# Altium PCB Control_and_inputs.PcbDoc
Units mil, origin at the board's own origin, x right, y up, seen from the top; angles counter-clockwise.
Board outline 3935 x 2550 mil, 2 copper layers (Top Layer, Bottom Layer); 25 components, 28 nets, 143 pads, 10 vias.
Unrouted connection lines stored in the file: 2.
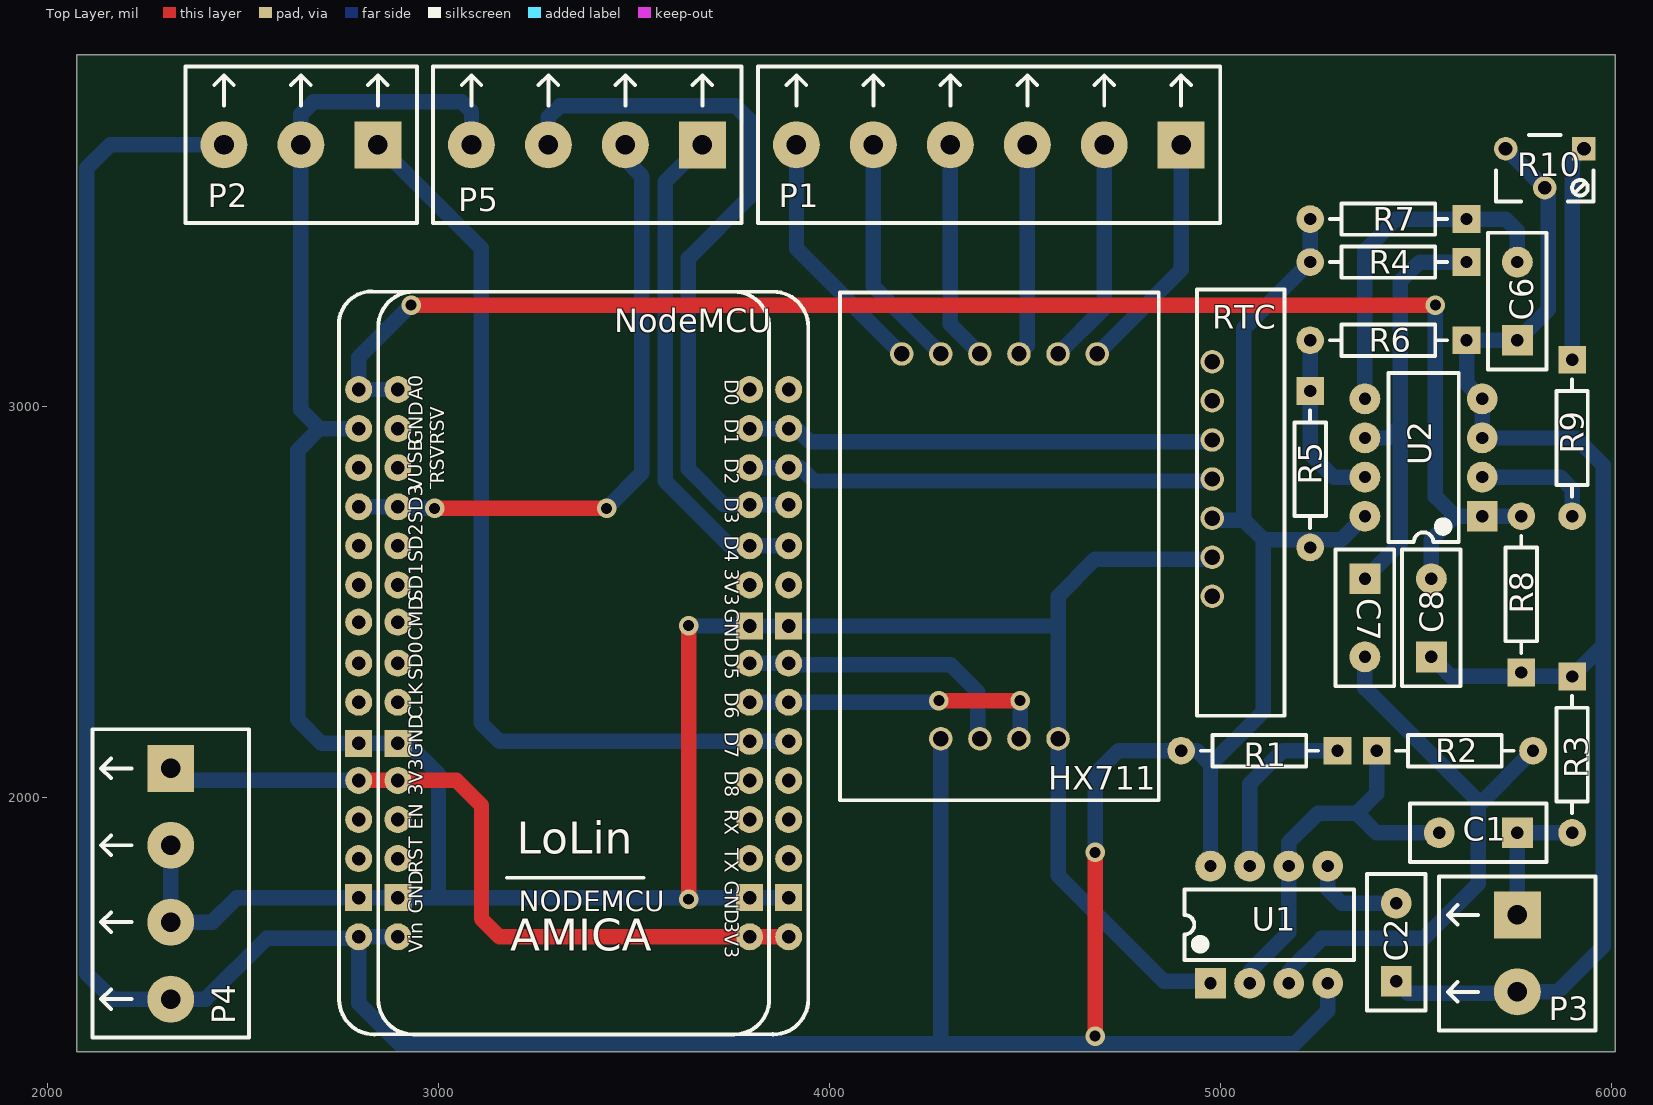
[diagram p0: Top Layer view]
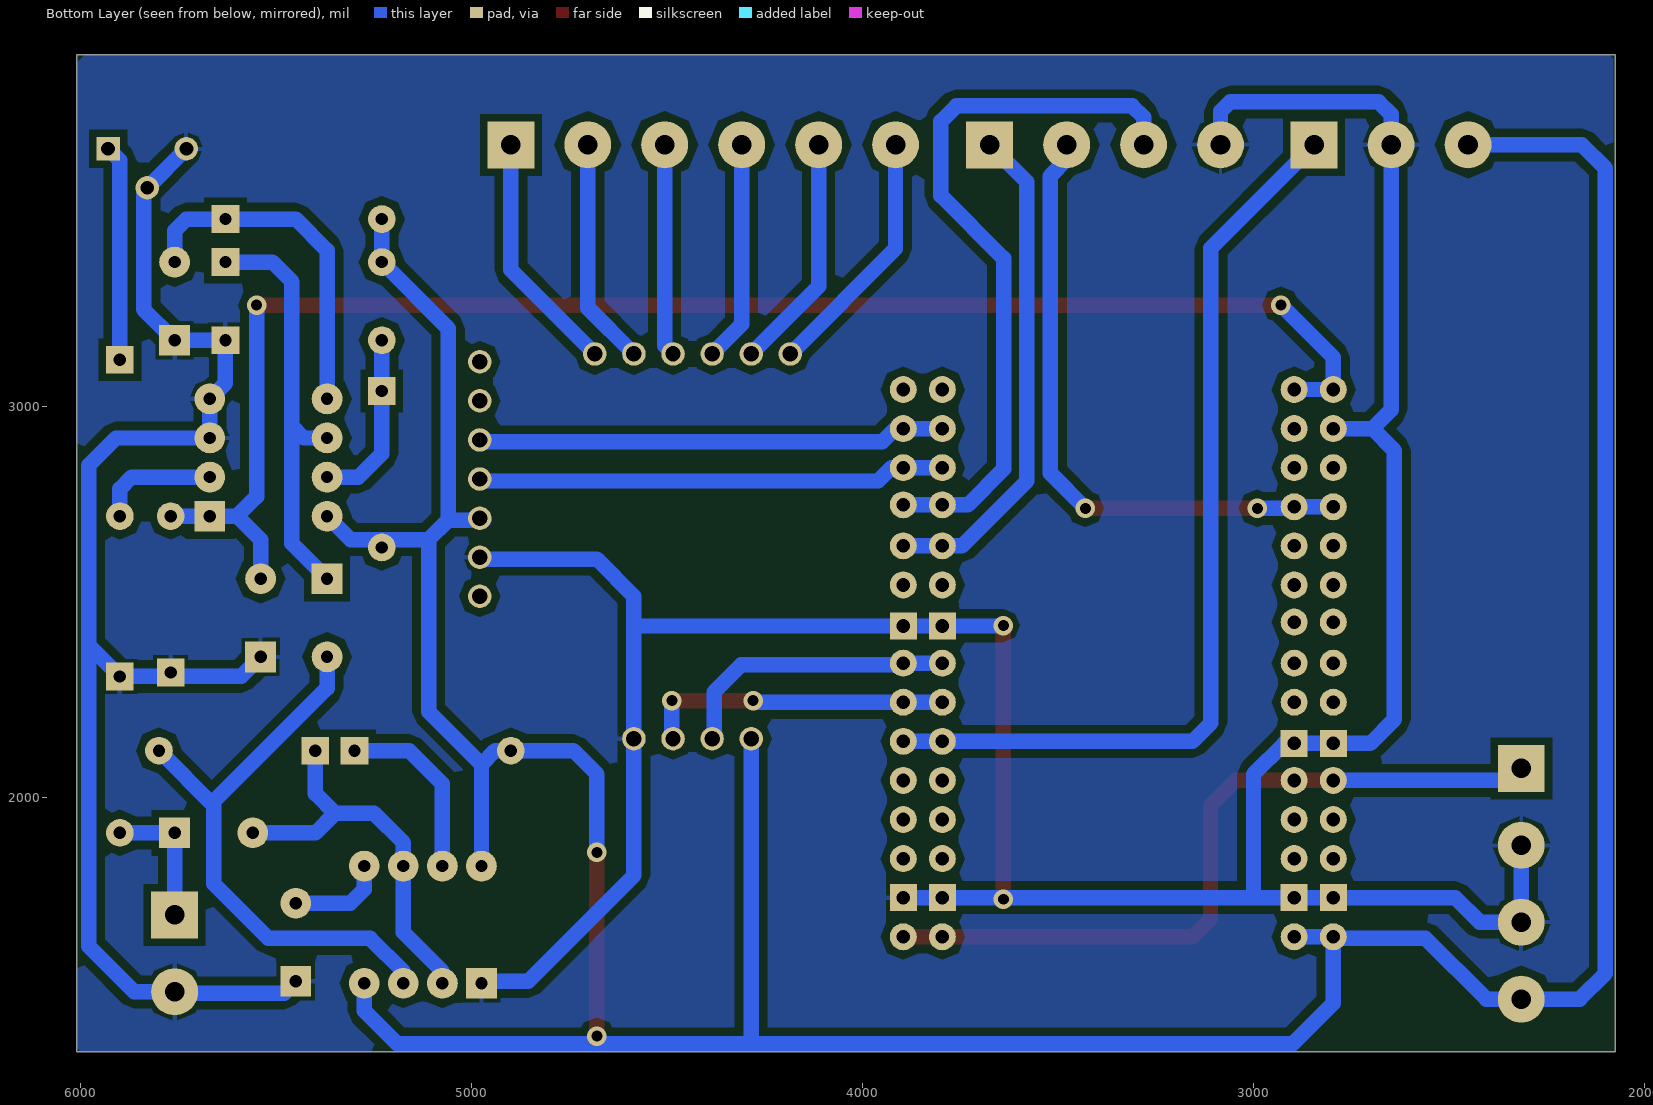
[diagram p1: Bottom Layer view, seen from below]
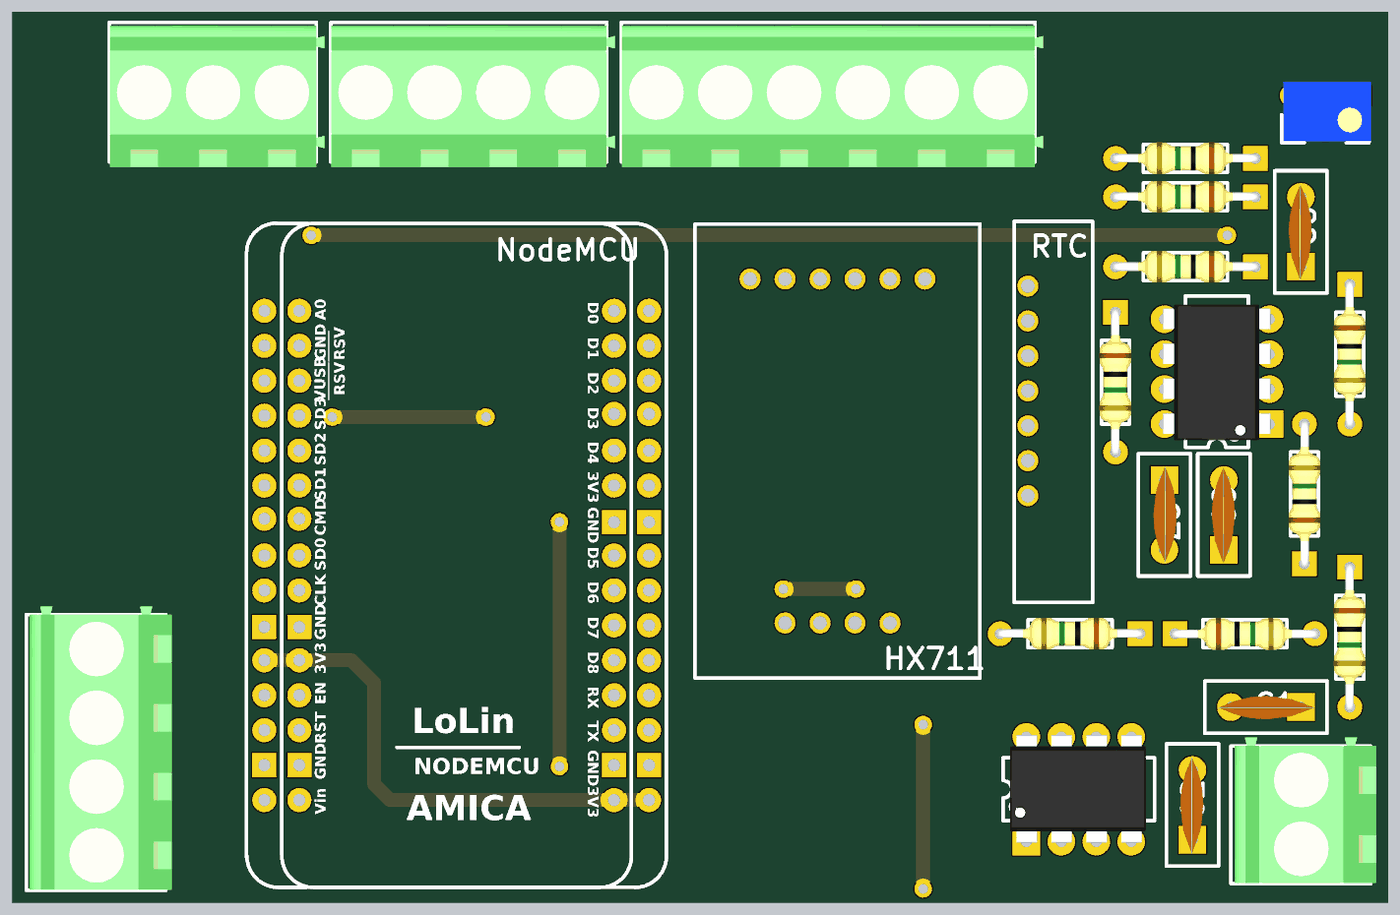
[diagram p2: 3D render of the assembled board from above, using the file's embedded part models]

## Layer stack, top to bottom
Top Solder: solder mask 0.4, Solder Resist, Dk 3.5
Top Layer: signal copper 1.4
Dielectric 1: dielectric 12.6, FR-4, Dk 4.8
Bottom Layer: signal copper 1.4
Bottom Solder: solder mask 0.4, Solder Resist, Dk 3.5

## Board outline
2075,1350 2075,3900 6010,3900 6010,1350

## Design rules (kind name [scope] priority, off if disabled: settings)
Clearance [All] p1: gap=20
PolygonConnect [All] p1: connectstyle=Relief reliefconductorwidth=10 reliefentries=4 polygonreliefangle="90 Angle" airgapwidth=10
RoutingVias [All] p1: holewidth=28 width=50 viastyle="Through Hole" minholewidth=28 minwidth=50 maxholewidth=28 maxwidth=50
SolderMaskExpansion [All] p1: expansion=4
Width [All] p1: maxlimit=39.37 minlimit=39.37 preferedwidth=39.37
30 further rules are at their usual default settings.

## Components (designator, comment, footprint, x,y, rotation, side; value= is the part's Value field where it differs from the comment)
C1 "22nF" C200-350-150 5760,1910 r180 top
C2 "100nF" C200-350-150 5450,1530 r90 top
C6 "10nF" C200-350-150 5760,3170 r90 top
C7 "470pF" C200-350-150 5370,2560 r270 top
C8 "100nF" C200-350-150 5540,2360 r90 top
HX711 "HX711" HX711 4685,3135 r270 top
NodeMCU "ESP-F DevKit V4" "LoLin (+ NodeMCU)" 2845,3290 r0 top
P1 "Loads Cells" KRE_6 4900,3670 r180 top
P2 "Temp Sensor" KRE_3 2845,3670 r180 top
P3 "Water Level Sensor Capacitive" KRE_2 5760,1700 r270 top
P4 "Power Sources" KRE_4 2315,2075 r270 top
P5 "Outs" KRE_4 3675,3670 r180 top
R1 "10K" R400-2.0mm 5300,2120 r180 top
R2 "100K" R400-2.0mm 5400,2120 r0 top
R3 "4.7M" R400-2.0mm 5900,2310 r270 top
R4 "10K" R400-2.0mm 5630,3370 r180 top
R5 "10K" R400-2.0mm 5230,3040 r270 top
R6 "10K" R400-2.0mm 5630,3170 r180 top
R7 "6.8K" R400-2.0mm 5630,3480 r180 top
R8 "100K" R400-2.0mm 5770,2320 r90 top
R9 "12K" R400-2.0mm 5900,3120 r270 top
R10 "5K" Trimpot-3260W 5930,3660 r180 top
RTC "Tiny RTC DS1307" TinyRTC 4940,3300 r0 top
U1 "NE555" DIP08-300(100) 4975,1525 r0 top
U2 "LM331" DIP08-300(100) 5670,2720 r90 top

## Footprints (in the part's own frame and the unit in brackets; to place one, negate y for a bottom-side part, rotate by r counter-clockwise, add the part's x,y. Pads: shape width x height; smd on the part's side, far side on the other; paste and mask are expansions set on the pad)
C200-350-150 [mm] "Radial Cap, Thru-Hole; 2 Leads; 0.2 in Pin Spacing"
  rect 2x2 hole 0.8: 1(0,0)
  round 2 hole 0.8: 2(5.08,0)
  silkscreen extent -1.91,-1.91 6.98,1.91, body extent -1.01,-0.81 5.98,0.89, height 7.31
DIP08-300(100) [mm] "DIP; 8 Leads; Row Spacing 7.62 mm; Pitch 2.54 mm"
  rect 2x2 hole 0.8: 1(0,0)
  round 2 hole 0.8: 2(2.54,0) 3(5.08,0) 4(7.62,0) 5(7.62,7.62) 6(5.08,7.62) 7(2.54,7.62) 8(0,7.62)
  silkscreen extent -1.69,1.52 9.31,6.1, body extent -1.19,-0.08 8.69,7.75, height 4.3
HX711 [mil]
  round 60 hole 39.37: 1(0,0) 2(0,-100) 3(0,-200) 4(0,-300) 5(0,-400) 6(0,-500) 7(984.25,-100) 8(984.25,-200) 9(984.25,-300) 10(984.25,-400)
  silkscreen extent -157,-657 1142,157
KRE_2 [mil] "Terminal Block 2 pins"
  rect 120x120 hole 50: 1(0,0)
  round 120 hole 50: 2(196.85,0)
  silkscreen extent -98,-200 295,200, body extent -123,-190 294,216, height 559
KRE_3 [mil] "Terminal Block 3 pins"
  rect 120x120 hole 50: 1(0,0)
  round 120 hole 50: 2(196.85,0) 3(393.7,0)
  silkscreen extent -100,-200 492,200, body extent -123,-190 491,216, height 559
KRE_4 [mil] "Terminal Block 4 pins"
  rect 120x120 hole 50: 1(0,0)
  round 120 hole 50: 2(196.85,0) 3(393.7,0) 4(590.55,0)
  silkscreen extent -100,-200 689,200, body extent -123,-190 688,216, height 559
KRE_6 [mil] "Terminal Block 6 pins"
  rect 120x120 hole 50: 1(0,0)
  round 120 hole 50: 2(196.85,0) 3(393.7,0) 4(590.55,0) 5(787.4,0) 6(984.25,0)
  silkscreen extent -100,-200 1083,200, body extent -123,-190 1081,216, height 559
"LoLin (+ NodeMCU)" [mil]
  round 69 hole 35: 3V3(-49,-1246) 3V3(51,-1246) 3V3(951,-1646) 3V3(951,-746) 3V3(1051,-1646) 3V3(1051,-746) A0(-49,-246) A0(51,-246) CLK(-49,-1046) CLK(51,-1046) CMD(-49,-841) CMD(51,-841) D0(951,-246) D0(1051,-246) D1(951,-346) D1(1051,-346) D2(951,-446) D2(1051,-446) D3(951,-541) D3(1051,-541) D4(951,-646) D4(1051,-646) D5(951,-946) D5(1051,-946) D6(951,-1046) D6(1051,-1046) D7(951,-1146) D7(1051,-1146) D8(951,-1246) D8(1051,-1246) EN(-49,-1346) EN(51,-1346) GND(-49,-346) RST(-49,-1446) RST(51,-1446) RX(951,-1346) RX(1051,-1346) SD0(-49,-946) SD0(51,-946) SD1(-49,-746) SD1(51,-746) SD2(-49,-646) SD2(51,-646) SD3(-49,-546) SD3(51,-546) TX(951,-1446) TX(1051,-1446) VIN(-49,-1646) VIN(51,-1646) VUSB(-49,-446) ""(51,-446) ""(51,-346)
  rect 69x69 hole 35: GND(-49,-1546) GND(-49,-1151) GND(51,-1546) GND(51,-1151) GND(951,-1546) GND(951,-851) GND(1051,-1546) GND(1051,-851)
  silkscreen extent -100,-1896 1101,5
R400-2.0mm [mm] "Axial Device, Thru-Hole; 2 Leads; 0.4 in Pin Spacing"
  rect 1.8x1.8 hole 0.8: 1(0,0)
  round 1.8 hole 0.8: 2(10.16,0)
  silkscreen extent 1.27,-1.02 8.89,1.02, body extent -0.3,-1.17 10.46,1.14, height 2.93
TinyRTC [mm]
  round 1.524 hole 1: 1(1,-4.7) 2(1,-7.24) 3(1,-9.78) 4(1,-12.32) 5(1,-14.86) 6(1,-17.4) 7(1,-19.94)
  silkscreen extent 0,-27.7 5.7,0
Trimpot-3260W [mil] "Trimpot 3260W"
  rect 60x60 hole 35.43: 1(0,0)
  round 60 hole 35.43: 2(100,100) 3(200,0)
  silkscreen extent -25,-35 225,135, body extent -30,-40 220,130, height 290

## Part data
C1 C2 C6 C7 C8: library part Capacitor, "Capacitor"
NodeMCU: library part "NodeMCU V1.0 ESP-12E_1"
P1: library part KRE_6, "Terminal Block 1x6"
P2: library part KRE_3, "Terminal Block 1x3"
P3: library part KRE_2, "Terminal Block 1x2"
P4 P5: library part KRE_4, "Terminal Block 1x4"
R1 R2 R3 R4 R5 R6 R7 R8 R9: library part Resistor, "Resistor"
R10: library part Trimpot, "Trimpot"
U1: "NE555 Precision Timers"

## Via types
v1: diameter 50, hole 28, Top Layer to Bottom Layer, 10 vias

## Nets (pads, with @x,y where several pads share a name; then routed paths per layer and width w, separated by ;. In a path a pad name is that pad's centre, name@x,y a point inside that pad or via, vN(x,y) a via of type N, cw(c..) or ccw(c..) an arc to the next point about the centre after c; other vN are vias at no path point)
3.3V: NodeMCU.3V3 P4.1 | length 1929.4
  Top Layer w39.37: NodeMCU.3V3@2796,2044 2896,2044 3046,2044 3110,1980 3110,1690 3156,1644 3796,1644 NodeMCU.3V3@3896,1644
  Bottom Layer w39.37: P4.1 2346,2044 NodeMCU.3V3@2796,2044
5V: HX711.10 NodeMCU.VIN P2.3 P4.4 R1.2 R4.2 R5.2 R7.2 RTC.5 U1.4 U1.8 U2.8 | length 10080.3
  Top Layer w39.37: v1(4680,1390) v1(4680,1860)
  Bottom Layer w39.37: P2.3 2160,3670 2100,3610 2100,1550 2165.55,1484.45 P4.4 2404.45,1484.45 2560,1640 2792,1640 NodeMCU.VIN@2796,1644 ; NodeMCU.VIN@2896,1644 NodeMCU.VIN@2796,1644 ; 4285,1375 HX711.10 ; v1(4680,1860) 4680,2060 4740,2120 R1.2 4940,2120 4975,2085 ; RTC.5@4969.37,2709.96 5060.04,2709.96 ; U1.8 4975,2085 ; R7.2 R4.2 5060.04,3200.04 5060.04,2709.96 ; U1.4 5275,1455 5190,1370 2900,1370 2796,1474 NodeMCU.VIN@2796,1644 ; U2.8 5310,2660 5110,2660 ; 4975,2085 5110,2220 5110,2660 ; 5060.04,2709.96 5110,2660
A0: C8.2 NodeMCU.A0 R8.2 U2.1 | length 3907.1
  Top Layer w39.37: v1(2930,3260) v1(5550,3260)
  Bottom Layer w39.37: NodeMCU.A0@2896,3044 2796,3044 2796,3126 v1(2930,3260) ; C8.2 5540,2660 5600,2720 ; v1(5550,3260) 5550,2770 5600,2720 ; R8.2 U2.1 5600,2720
GND: C2.1 C6.1 C8.1 HX711.7 NodeMCU.GND P2.2 P3.2 P4.2 P4.3 P5.4 R3.1 R6.1 R8.1 R10.2 R10.3 RTC.6 U1.1 U2.3 U2.4 | length 11703.2
  Top Layer w39.37: v1(3640,1740) v1(3640,2440)
  Bottom Layer w39.37: P4.2 P4.3 2421.3,1681.3 2484,1744 2796,1744 NodeMCU.GND@3896,1744 ; NodeMCU.GND@2796,2944 2696,2944 ; 3000,1744 3000,2060 2921,2139 2796,2139 2701,2139 2640,2200 2640,2888 2696,2944 ; P5.4 3084.45,3755.55 3060,3780 2680,3780 2648.15,3748.15 P2.2 2648.15,2991.85 2696,2944 ; v1(3640,2440) 3761,2439 3896,2439 4584,2439 ; RTC.6@4969.37,2609.96 4679.96,2609.96 4585,2515 HX711.7 4585,1800.79 4855.67,1530.12 4969.88,1530.12 U1.1 U1.1@4975,1543.11 ; C2.1 5480,1500 5756.85,1500 P3.2 5863.15,1503.15 5980,1620 5980,2390 ; C8.1 5590,2310 R3.1 5980,2390 ; R10.3 R10.2 5839.06,3560 5839.06,3249.06 C6.1 R6.1 5630,3060 U2.4 U2.3 5910,2920 5980,2850 5980,2390
NetC1_1: C1.1 P3.1 R3.2 | length 350
  Bottom Layer w39.37: P3.1 C1.1 R3.2
NetC1_2: C1.2 R2.1 U1.2 U1.6 | length 1018.9
  Bottom Layer w39.37: U1.2 5075,1555 5175,1655 5175,1740 U1.6 5175,1885 5250,1960 5350,1960 ; R2.1 5400,2010 5350,1960 ; C1.2 5400,1910 5350,1960
NetC2_2: C2.2 U1.5 | length 249.5
  Bottom Layer w39.37: U1.5 5275,1765 5310,1730 C2.2
NetC6_2: C6.2 R7.1 U2.5 | length 895.6
  Bottom Layer w39.37: U2.5 5370,3400 5450,3480 R7.1 5730,3480 5760,3450 C6.2
NetC7_1: C7.1 R4.1 U2.6 | length 1090.4
  Bottom Layer w39.37: C7.1 5460,2650 5460,2950 ; U2.6 5430,2920 5460,2950 ; R4.1 5510,3370 5460,3320 5460,2950
NetC7_2: C7.2 R2.2 U1.3 | length 1496.3
  Bottom Layer w39.37: U1.3 5175,1555 5260,1640 5520,1640 5660,1780 5660,1980 R2.2 ; C7.2 5370,2280 5660,1990
NetHX711_1: HX711.1 P1.1 | length 624.1
  Bottom Layer w39.37: HX711.1 4900,3350 P1.1
NetHX711_2: HX711.2 P1.2 | length 583.9
  Bottom Layer w39.37: HX711.2 4703.15,3253.15 P1.2
NetHX711_3: HX711.3 P1.3 | length 543.8
  Bottom Layer w39.37: HX711.3 4506.3,3156.3 P1.3
NetHX711_4: HX711.4 P1.4 | length 566.3
  Bottom Layer w39.37: P1.4 4309.45,3210.55 HX711.4
NetHX711_5: HX711.5 P1.5 | length 606.4
  Bottom Layer w39.37: P1.5 4112.6,3307.4 HX711.5
NetHX711_6: HX711.6 P1.6 | length 646.5
  Bottom Layer w39.37: P1.6 3915.75,3404.25 HX711.6
NetHX711_8: HX711.8 NodeMCU.D6 | length 787.9
  Top Layer w39.37: v1(4280,2248) v1(4488,2248)
  Bottom Layer w39.37: NodeMCU.D6@3796,2244 3896,2244 4276,2244 v1(4280,2248) ; HX711.8@4488,2153.75 v1(4488,2248)
NetHX711_9: HX711.9 NodeMCU.D5 | length 736
  Bottom Layer w39.37: NodeMCU.D5@3796,2344 3896,2344 3900,2340 4310,2340 4380,2270 4380,2155.75 HX711.9
NetNodeMCU_D1: NodeMCU.D1 RTC.3 | length 1187.5
  Bottom Layer w39.37: NodeMCU.D1@3796,2944 3896,2944 3916,2944 3950.04,2909.96 RTC.3@4969.37,2909.96
NetNodeMCU_D2: NodeMCU.D2 RTC.4 | length 1187.5
  Bottom Layer w39.37: NodeMCU.D2@3796,2844 3896,2844 3926,2844 3960.04,2809.96 RTC.4@4969.37,2809.96
NetNodeMCU_D3: NodeMCU.D3 P5.3 | length 1868.3
  Bottom Layer w39.37: P5.3 3281.3,3740.67 3310.31,3769.69 3760.31,3769.69 3800,3730 3800,3540 3639.37,3379.37 3639.37,2840.63 3731,2749 3796,2749 NodeMCU.D3@3896,2749
NetNodeMCU_D7: NodeMCU.D7 P2.1 | length 2394.8
  Bottom Layer w39.37: P2.1 3109.06,3405.94 3109.06,2190.94 3156,2144 NodeMCU.D7@3896,2144
NetR1_1: R1.1 U1.7 | length 470.2
  Bottom Layer w39.37: U1.7 5075,2035 5160,2120 R1.1
NetR5_1: R5.1 R6.2 U2.7 | length 454.9
  Bottom Layer w39.37: R6.2 R5.1 5230,2880 5290,2820 U2.7
NetR9_1: R9.1 R10.1 | length 552.4
  Bottom Layer w39.37: R9.1 5900,3630 R10.1
NetR9_2: R9.2 U2.2 | length 312.4
  Bottom Layer w39.37: U2.2 5870,2820 5900,2790 R9.2
S1_IN: NodeMCU.D4 P5.1 | length 1284.1
  Bottom Layer w39.37: P5.1 3580,3575 3580,2810 3746,2644 NodeMCU.D4@3896,2644
S2_OUT: NodeMCU.SD3 P5.2 | length 1614.6
  Top Layer w39.37: v1(2990,2740) v1(3430,2740)
  Bottom Layer w39.37: NodeMCU.SD3@2796,2744 NodeMCU.SD3@2896,2744 ; NodeMCU.SD3@2900,2740 v1(2990,2740) ; v1(3430,2740) 3520,2830 3520,3590 3478.15,3631.85 P5.2
pads on no net: NodeMCU. NodeMCU.CLK NodeMCU.CMD NodeMCU.D0 NodeMCU.D8 NodeMCU.EN NodeMCU.RST NodeMCU.RX NodeMCU.SD0 NodeMCU.SD1 NodeMCU.SD2 NodeMCU.TX NodeMCU.VUSB RTC.1 RTC.2 RTC.7

## Polygon pours and split planes (outlines as drawn)
GND on Bottom Layer "Pour" (solid, remove dead copper, pour order 4): 2090,3900 5990,3900 6010,3880 6010,1360 6000,1350 2090,1350 2080,1360 2080,3890

## Silkscreen, mask and mechanical layers (free items; w line width, h text height)
Mechanical 1:
  the board outline again, w11.81

## Text inside footprints (layer, text, board x,y; h text height)
NodeMCU: Top Overlay "RSV" at 3026,2802.57 h60 r90; Top Overlay "RSV" at 3026,2903 h60 r90; Top Overlay "GND" at 2971,2102 h60 r90; Top Overlay "3V3" at 2971,2005 h60 r90; Top Overlay "EN" at 2971,1918 h60 r90; Top Overlay "RST" at 2971,1806 h60 r90; Top Overlay "GND" at 2971,1703 h60 r90; Top Overlay "Vin" at 2971,1603 h60 r90; Top Overlay "D7" at 3721,2168.77 h60 r270; Top Overlay "D8" at 3721,2068.89 h60 r270; Top Overlay "RX" at 3721,1969.94 h60 r270; Top Overlay "TX" at 3721,1871 h60 r270; Top Overlay "GND" at 3721,1787.8 h60 r270; Top Overlay "3V3" at 3721,1684 h60 r270; Top Overlay "D6" at 3721,2269.88 h60 r270; Top Overlay "CMD" at 2971,2400.86 h60 r90; Top Overlay "D0" at 3721,3070 h60 r270; Top Overlay "D1" at 3721,2968.65 h60 r270; Top Overlay "D2" at 3721,2868.42 h60 r270; Top Overlay "D3" at 3721,2768.42 h60 r270; Top Overlay "D4" at 3721,2670 h60 r270; Top Overlay "3V3" at 3721,2584.99 h60 r270; Top Overlay "GND" at 3721,2483 h60 r270; Top Overlay "D5" at 3721,2369 h60 r270; Top Overlay "A0" at 2971,3017 h60 r90; Top Overlay "GND" at 2971,2903 h60 r90; Top Overlay "VUSB" at 2970,2785 h60 r90; Top Overlay "SD3" at 2971,2702.14 h60 r90; Top Overlay "SD2" at 2971,2601.71 h60 r90; Top Overlay "SD1" at 2971,2501.29 h60 r90; Top Overlay "SD0" at 2971,2300.43 h60 r90; Top Overlay "CLK" at 2971,2200 h60 r90; Top Overlay "NODEMCU" at 3205,1691 h90; Top Overlay "AMICA" at 3184,1581 h140; Top Overlay "LoLin" at 3200,1830 h140